# Altium PCB motor_driver.PcbDoc
Units mil, origin at the board's own origin, x right, y up, seen from the top; angles counter-clockwise.
Board outline 2190 x 2825 mil, 2 copper layers (Top Layer, Bottom Layer); 29 components, 33 nets, 118 pads, 30 vias.
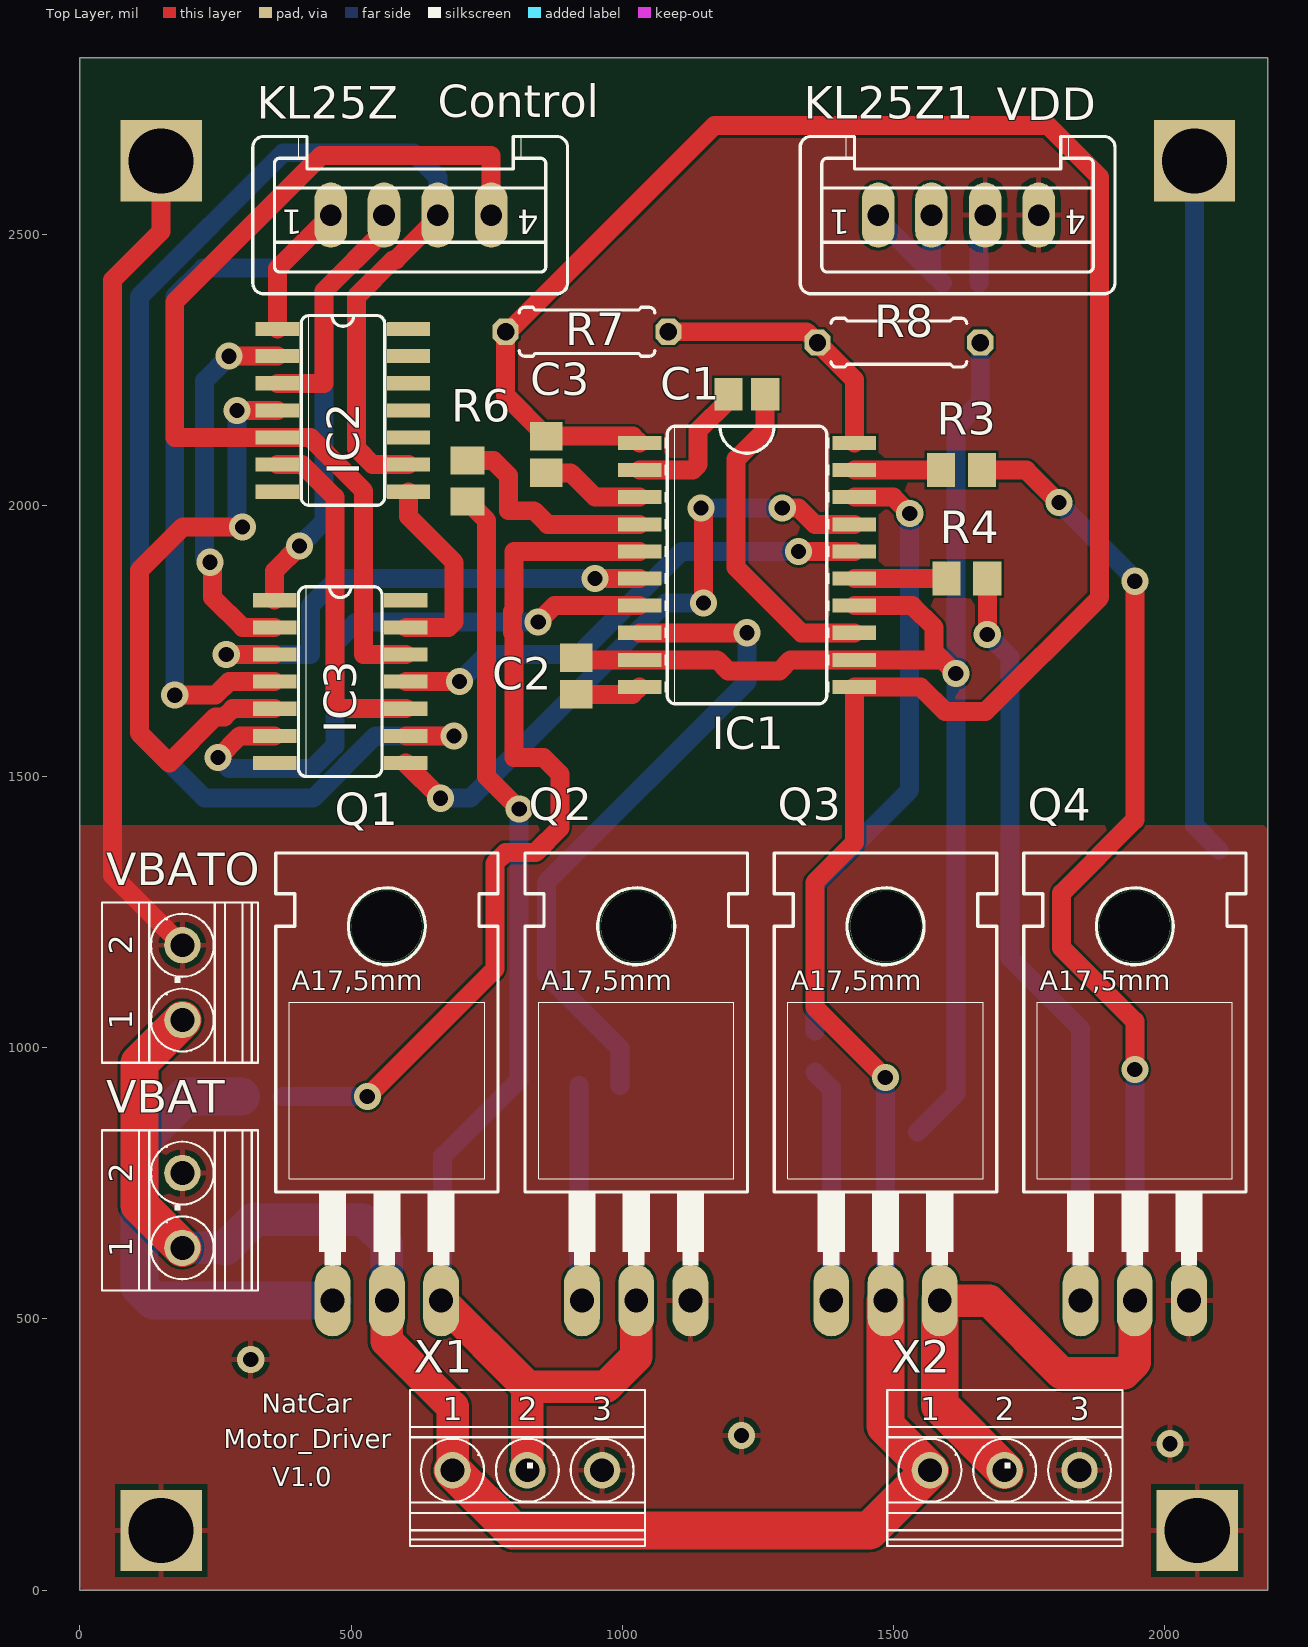
[diagram p0: Top Layer view]
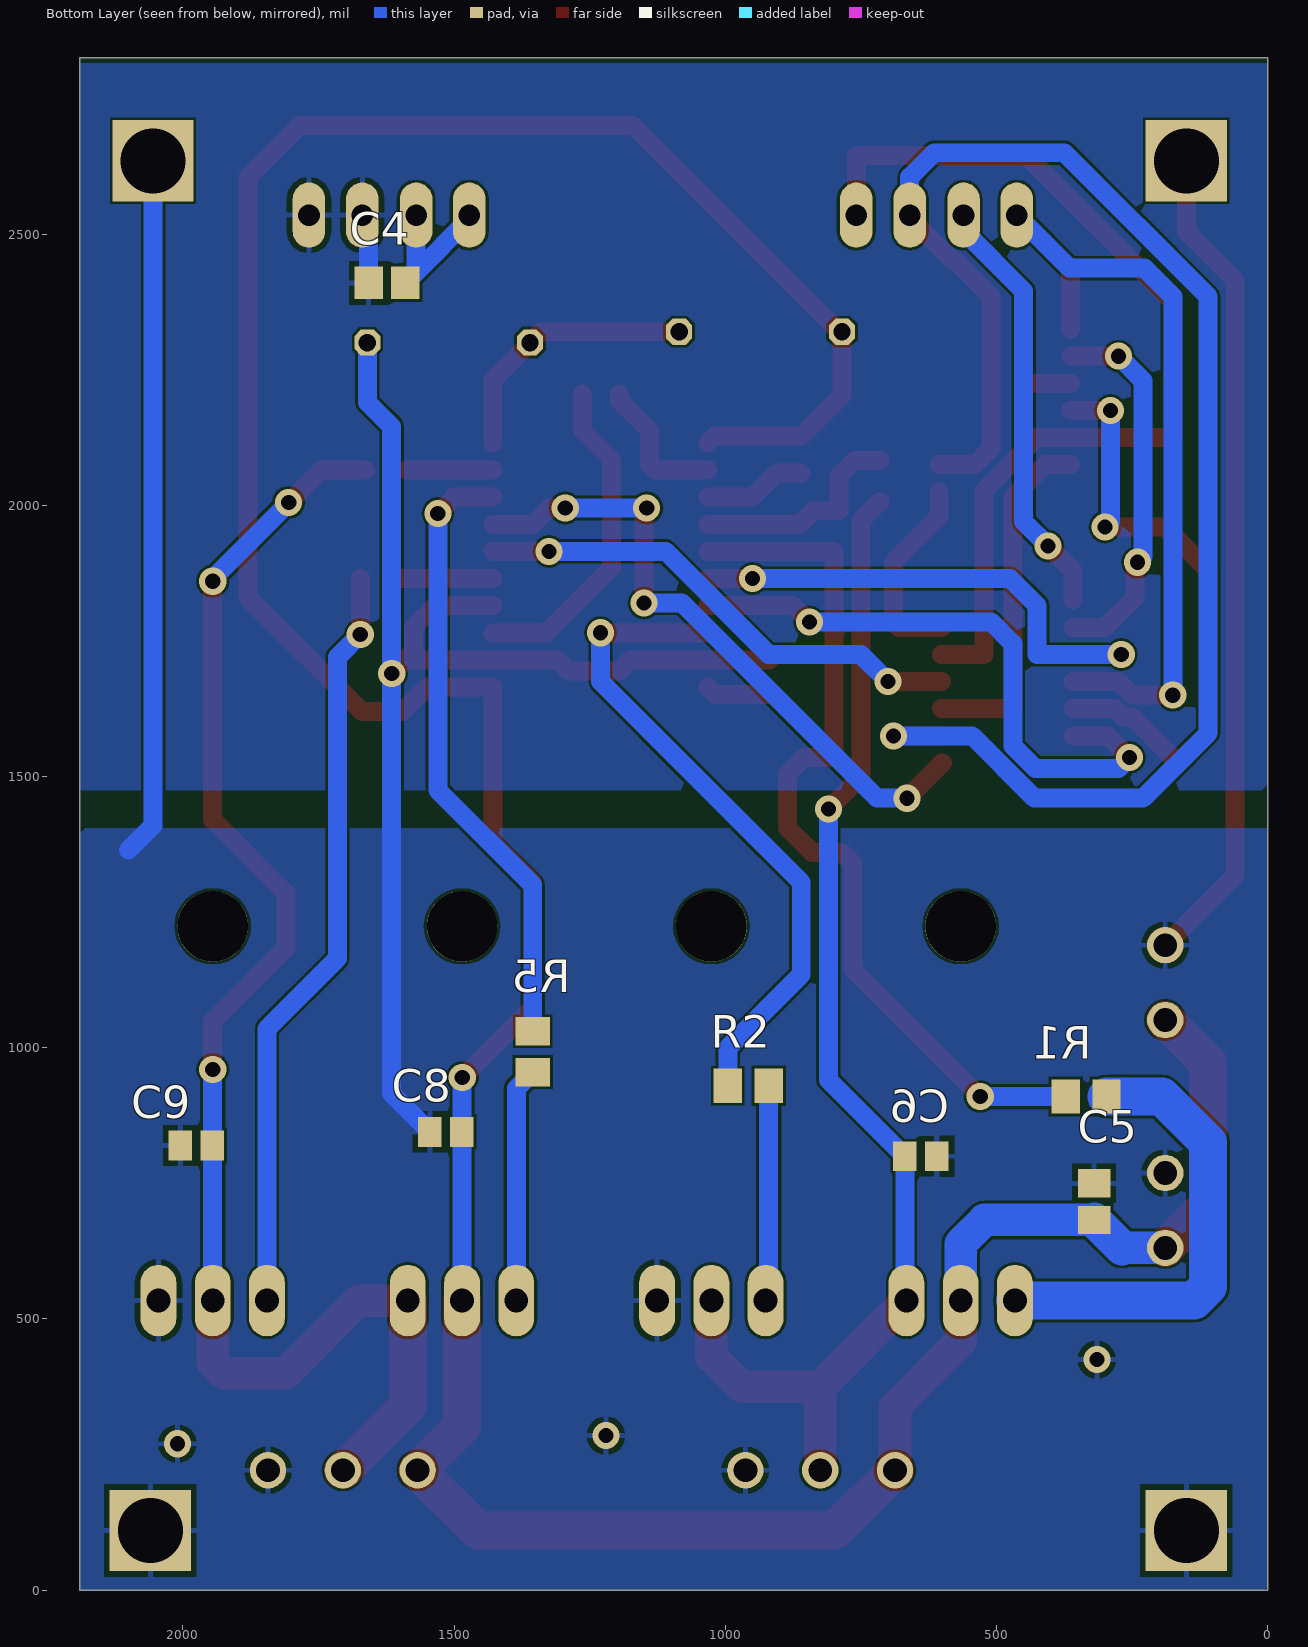
[diagram p1: Bottom Layer view, seen from below]

## Layer stack, top to bottom
Top Solder: solder mask 0.4, Solder Resist, Dk 3.5
Top Layer: signal copper 1.4
Dielectric 1: dielectric 12.6, FR-4, Dk 4.8
Bottom Layer: signal copper 1.4
Bottom Solder: solder mask 0.4, Solder Resist, Dk 3.5

## Board outline
0,0 2190,0 2190,2825 0,2825

## Design rules (kind name [scope] priority, off if disabled: settings)
Clearance [All] p1: gap=5
HoleSize [All] p1: absolutevalues=TRUE maxlimit=150 minlimit=15 maxpercent=80.000 minpercent=20.000
PolygonConnect [All] p1: connectstyle=Relief reliefconductorwidth=10 reliefentries=4 polygonreliefangle="90 Angle" airgapwidth=10
RoutingVias [All] p1: holewidth=28 width=50 viastyle="Through Hole" minholewidth=28 minwidth=50 maxholewidth=28 maxwidth=50
SolderMaskExpansion [All] p1: expansion=4
UnpouredPolygon [All] p1: allowunpoured=FALSE
Width pwr [InNetClass('Motor')] p1: maxlimit=100 minlimit=35 preferedwidth=75
Width signal [All] p2: maxlimit=35 minlimit=10 preferedwidth=27 checkconnectedcopper=TRUE
28 further rules are at their usual default settings.

## Classes and differential pairs
net class Motor: GND NetC6_1 NetC9_1 NetQ1_G NetQ2_G NetQ3_G NetQ4_G VSS
net class KL25Z: GNDD NetIC1_6 NetIC1_7 NetIC1_16 NetIC1_17 NetIC2_1 NetIC2_2 NetIC2_3 NetIC2_4 NetIC2_5 NetIC2_6 NetIC2_8 NetIC2_9 VCC
net class MC33883: GND IC1EN NetC1_1 NetC1_2 NetC2_1 NetC3_2 NetC6_1 NetIC1_4 NetIC1_5 NetIC1_6 NetIC1_7 NetIC1_8 NetIC1_15 NetIC1_16 NetIC1_17 NetIC1_18 NetIC1_19 NetQ1_G NetQ2_G VSS

## Components (designator, comment, footprint, x,y, rotation, side; value= is the part's Value field where it differs from the comment)
C1 "33 nF" C0805#1 1230,2205 r180 top
C2 "470 nF" C0805#1 915,1685 r90 top
C3 "470 nF" C0805#1 860,2094 r270 top
C4 "1uF" C0805#1 1623.46,2410 r0 bottom
C5 "Cap Pol3" C0805#1 320,716 r90 bottom
C6 "Cap Pol3" C0805#2 639.53,800 r180 bottom
C8 "Cap Pol3" C0805#2 1515,845 r0 bottom
C9 "Cap Pol3" C0805#2 1975,820 r0 bottom
IC1 "MC33883DW" SO20l 1230,1890 r270 top
IC2 "74*04" SO14 485,2175 r270 top
IC3 "74*08N" SO14 480,1675 r270 top
KL25Z "S04P" S04P 610.79,2535 r180 top
KL25Z1 "S04P" S04P 1620,2535 r180 top
Q1 "irf3704" TO220BH 566.06,783.9 r0 top
Q2 "irf3704" TO220BH 1025.71,783.9 r0 top
Q3 "irf3704" TO220BH 1485.35,783.9 r0 top
Q4 "irf3704" TO220BH 1945,783.9 r0 top
R1 "50" M0805 335,910 r180 bottom
R2 "50" M0805 958,930 r180 bottom
R3 "10" M0805 1625,2065 r0 top
R4 "50" M0805 1635,1865 r0 top
R5 "50" M0805 1355,993 r270 bottom
R6 "10" M0805 715,2045 r270 top
R7 "R-US_0207/7" 0207/7 935,2320 r180 top
R8 "R-US_0207/7" 0207/7 1510,2300 r180 top
VBAT "1751248" 1751248 185,700 r90 top
VBATO "1751248" 1751248 185,1120 r90 top
X1 "Motor0" 1751251 825,225 r0 top
X2 "Motor2" 1751251 1705,225 r0 top

## Footprints (in the part's own frame and the unit in brackets; to place one, negate y for a bottom-side part, rotate by r counter-clockwise, add the part's x,y. Pads: shape width x height; smd on the part's side, far side on the other; paste and mask are expansions set on the pad)
0207/7 [mil]
  oct 48x48 hole 32: 1(-150,0) 2(150,0)
  silkscreen extent -125,-45 125,45
1751248 [mil]
  round 67 hole 44: 1(-68.9,-3.94) 2(69,-3.94)
  silkscreen extent -148,-144 148,144
1751251 [mil]
  round 67 hole 44: 1(-137.8,-3.94) 2(0,-3.94) 3(138,-3.94)
  silkscreen extent -217,-144 217,144
C0805#1 [mil]
  rect 52x60 smd: 1(-33.46,0) 2(34,0)
C0805#2 [mil] "Chip Capacitor, Body 2.0x1.3mm, IPC High Density"
  rect 43.31x55.12 smd: 1(-29.53,0) 2(29.53,0)
  body extent -43,-29 43,29, height 55
M0805 [mil]
  rect 52x63 smd: 1(-37.4,0) 2(38,0)
S04P [mil]
  oval 60x120 hole 40: 1(148,0) 2(50,0) 3(-49.21,0) 4(-147.64,0)
  silkscreen extent -288,-145 292,145
SO14 [mil]
  rect 26x80 smd: 1(-150,-121) 2(-100,-121) 3(-50,-121) 4(0,-121) 5(50,-121) 6(100,-121) 7(150,-121) 8(150,121) 9(100,121) 10(50,121) 11(0,121) 12(-50,121) 13(-100,121) 14(-150,121)
  silkscreen extent -175,-77 175,77
SO20l [mil]
  rect 26x80 smd: 1(-225,-198) 2(-175,-198) 3(-125,-198) 4(-75,-198) 5(-25,-198) 6(25,-198) 7(75,-198) 8(125,-198) 9(175,-198) 10(225,-198) 11(225,198) 12(175,198) 13(125,198) 14(75,198) 15(25,198) 16(-25,198) 17(-75,198) 18(-125,198) 19(-175,198) 20(-225,198)
  silkscreen extent -256,-152 256,152
TO220BH [mil]
  round 130 hole 130: 1(0,440)
  oval 66x132 hole 44: D(0,-250) G(-100,-250) S(100,-250)
  silkscreen extent -205,-185 205,575

## Part data
C1 C2 C3: library part C-USC0805, "<B>CAPACITOR</B>, American symbol"
C4: library part "Cap Pol3", "Polarized Capacitor (Surface Mount)"
C5 C6 C8 C9: "Polarized Capacitor (Surface Mount)"
IC1: "<b>Full Bridge Pre-Driver</b> 55V<p> / Source: www.motorola.com/... MC33883.pdf"
IC2: library part 74*04D
IC3: library part 74*08D
KL25Z KL25Z1: "<b>AMP MT CONNECTOR</b>"
Q1 Q2 Q3 Q4: library part IRF3704-H
R1 R2 R3 R4 R5 R6: library part R-US_M0805, "<B>RESISTOR</B>, American symbol"
R7 R8: "<B>RESISTOR</B>, American symbol"
VBAT VBATO: "<b>MKDS 1/ 2-3,5</b> Printklemme<p> / Nennstrom: 10 A<br> / Bemessungsspannung: 160 V<br> / Raster: 3,5 mm<br> / Polzahl: 2<br> / Montageart: L?ten<br> / Anschlussart: Schraubanschluss<br> / Anschlussrichtung vom Leiter zur Platine: 0°<br> / Source: http://eshop.phoenixcontact.com .. 1751248.pdf"
X1 X2: library part 1751251

## Free pads (board coordinates)
  rect 150x150 hole 120: 3(150,110) 3(150,2635) 3(2055,2635) 3(2060,110)

## Via types
v1: diameter 50, hole 28, Top Layer to Bottom Layer, 30 vias

## Nets (pads, with @x,y where several pads share a name; then routed paths per layer and width w, separated by ;. In a path a pad name is that pad's centre, name@x,y a point inside that pad or via, vN(x,y) a via of type N, cw(c..) or ccw(c..) an arc to the next point about the centre after c; other vN are vias at no path point)
GND: C2.2 C5.2 C6.2 C8.2 C9.2 IC1.9 IC1.12 IC1.14 pad.3 Q2.S Q4.S R8.1 VBAT.2 VBATO.2 X1.3 X2.3 | length 5290.1
  Top Layer w35: pad.3@150,2635 150,2505 60,2415 60,1317.94 VBATO.2 ; C2.2 919,1715 IC1.9 1175,1715 1195,1695 1290,1695 1310,1715 IC1.12 1590,1715 ; IC1.14 1535,1815 1575,1775 1575,1730 1590,1715 ; v1(1615,1690) 1590,1715
  Bottom Layer w35: C8.2 1615,915.47 v1(1615,1690) 1615,2145 1660,2190 R8.1 R8.1@1657.46,2302.54 ; pad.3@2055,2635 2055,1410 2100,1365
  other v1: 2010,270 1220,285 315,425
GNDD: C4.2 KL25Z1.3 KL25Z1.4 | length 129.9
  Bottom Layer w35: C4.2 1657.46,2523.25 KL25Z1.3
IC1EN: IC1.20 R7.1 R8.2 | length 496.5
  Top Layer w35: R7.1 1340,2320 R8.2 1428,2232 IC1.20
NetC1_1: C1.1 IC1.13 | length 609.9
  Top Layer w35: C1.1 1263.46,2138.46 1210,2085 1210,1885 1330,1765 IC1.13
NetC1_2: C1.2 IC1.2 | length 265.3
  Top Layer w35: IC1.2 1130,2065 1140,2075 1140,2138.1 1196,2194.1 C1.2
NetC2_1: C2.1 IC1.10 | length 122.6
  Top Layer w35: C2.1 1018.54,1651.54 IC1.10
NetC3_2: C3.2 IC1.3 | length 190.6
  Top Layer w35: C3.2 905,2060 950,2015 IC1.3
NetC6_1: C6.1 Q1.S Q2.D R6.2 X1.2 | length 2277.7
  Top Layer w35: R6.2 750,1972 750,1500 v1(810,1440)
  Top Layer w60: Q1.S 825,374.96 ; X1.2 825,374.96 ; Q2.D 1025.71,430.71 969.96,374.96 825,374.96
  Bottom Layer w35: Q1.S 669.06,536.89 C6.1 810,940.94 v1(810,1440)
NetC9_1: C9.1 Q3.S Q4.D R3.2 X2.2 | length 2707.5
  Top Layer w35: R3.2 1745,2065 v1(1805,2005) ; v1(1945,960) 1945,1048.9 1810,1183.9 1810,1285 1945,1420 v1(1945,1860)
  Top Layer w60: Q3.S 1676.1,533.9 1810,400 1925,400 1945,420 Q4.D
  Top Layer w70: Q3.S 1585.35,340.71 X2.2
  Bottom Layer w35: v1(1805,2005) 1945,1865 v1(1945,1860) ; Q4.D v1(1945,960)
NetIC1_4: IC1.4 R6.1 | length 403.7
  Top Layer w35: R6.1 762.6,2082.4 790,2055 790,1990 837.4,1990 862.4,1965 IC1.4
NetIC1_5: IC1.5 R1.1 | length 1643.4
  Top Layer w35: v1(530,910) 765,1145 765,1340 785,1360 840,1360 885,1405 885,1505 855,1535 800,1535 800,1762.82 797.5,1765.32 797.5,1804.68 800,1807.18 800,1915 IC1.5
  Bottom Layer w35: R1.1 v1(530,910)
NetIC1_6: IC1.6 IC3.3 | length 961.7
  Top Layer w35: v1(270,1725) IC3.3 ; v1(950,1865) IC1.6
  Bottom Layer w35: v1(270,1725) 425,1725 425,1815 475,1865 v1(950,1865)
NetIC1_7: IC1.7 IC3.6 | length 1140.5
  Top Layer w35: v1(255,1535) 295,1575 IC3.6 ; v1(845,1785) 875,1815 IC1.7
  Bottom Layer w35: v1(255,1535) 275,1515 428.43,1515 470,1556.57 470,1745 510,1785 v1(845,1785)
NetIC1_8: IC1.8 R2.1 | length 1242.3
  Top Layer w35: IC1.8 v1(1230,1765)
  Bottom Layer w35: R2.1 995.4,999.6 860,1135 860,1305 1230,1675 v1(1230,1765)
NetIC1_15: IC1.15 R4.1 | length 169.6
  Top Layer w35: IC1.15 R4.1
NetIC1_16: IC1.16 IC3.11 | length 926.4
  Top Layer w35: IC3.11 v1(700,1675) ; v1(1325,1915) IC1.16
  Bottom Layer w35: v1(700,1675) 750,1725 920,1725 1110,1915 v1(1325,1915)
NetIC1_17: IC1.17 IC3.8 | length 1202.5
  Top Layer w35: IC3.8 600,1525 v1(665,1460) ; v1(1145,1995) 1150,1995 v1(1150,1820) ; v1(1295,1995) 1325,1995 1355,1965 IC1.17
  Bottom Layer w35: v1(665,1460) 720,1460 1080,1820 v1(1150,1820) ; v1(1145,1995) v1(1295,1995)
NetIC1_18: IC1.18 R5.1 | length 1141.5
  Top Layer w35: IC1.18 1500,2015 v1(1530,1985)
  Bottom Layer w35: R5.1 1355,1300 1530,1475 v1(1530,1985)
NetIC1_19: IC1.19 R3.1 | length 159.6
  Top Layer w35: IC1.19 R3.1
NetIC2_1: IC2.1 IC3.4 KL25Z.1 | length 1530.2
  Top Layer w35: v1(175,1650) 250,1650 275,1675 IC3.4 ; IC2.1 364,2436.21 KL25Z.1
  Bottom Layer w35: v1(175,1650) 175,2385 227.21,2437.21 365,2437.21 KL25Z.1
NetIC2_2: IC2.2 IC3.2 | length 695.6
  Top Layer w35: v1(240,1895) 245,1890 245,1830 300,1775 IC3.2 ; v1(275,2275) IC2.2
  Bottom Layer w35: v1(240,1895) 230,1905 230,2230 v1(275,2275)
NetIC2_3: IC2.3 IC3.1 KL25Z.2 | length 1235.5
  Top Layer w35: IC3.1 359,1879 v1(405,1925) ; IC2.3 450,2225 450,2395 560.79,2505.79 KL25Z.2
  Bottom Layer w35: v1(405,1925) 450,1970 450,2395 560.79,2505.79 KL25Z.2
NetIC2_4: IC2.4 IC3.5 | length 1129.5
  Top Layer w35: v1(290,2175) IC2.4 ; v1(300,1960) 190,1960 110,1880 110,1580 165,1525 250,1610 266.57,1610 281.57,1625 IC3.5
  Bottom Layer w35: v1(290,2175) 290,1970 v1(300,1960)
NetIC2_5: IC2.5 IC3.12 KL25Z.4 | length 1823.7
  Top Layer w35: IC3.12 523.25,1725 523.25,2026.75 425,2125 IC2.5 175,2125 175,2375 445,2645 758.43,2645 KL25Z.4
NetIC2_6: IC2.6 IC3.10 | length 651.9
  Top Layer w35: IC2.6 410,2075 470,2015 470,1625 IC3.10
NetIC2_8: IC2.8 IC3.13 | length 367.9
  Top Layer w35: IC3.13 680,1775 690,1785 690,1895 606,1979 IC2.8
NetIC2_9: IC2.9 IC3.9 KL25Z.3 | length 2923.3
  Top Layer w35: IC3.9 v1(690,1575) ; IC2.9 540,2075 510,2105 510,2385 577.5,2452.5 582.53,2452.5 660,2529.97 KL25Z.3
  Bottom Layer w35: KL25Z.3 660,2605 615,2650 375,2650 110,2385 110,1580 230,1460 430,1460 545,1575 v1(690,1575)
NetQ1_G: Q1.G R1.2 | length 854.1
  Bottom Layer w70: R1.2 195,910 110,825 110,560 136.1,533.9 Q1.G
NetQ2_G: Q2.G R2.2 | length 398.5
  Bottom Layer w35: R2.2 920,539.61 Q2.G
NetQ3_G: Q3.G R5.2 | length 433.7
  Bottom Layer w35: R5.2 1385.35,924.65 Q3.G
NetQ4_G: Q4.G R4.2 | length 1402.3
  Top Layer w35: v1(1673,1762) R4.2
  Bottom Layer w35: v1(1673,1762) 1715,1720 1715,1165 1845,1035 Q4.G
VCC: C4.1 KL25Z1.1 KL25Z1.2 | length 278.9
  Bottom Layer w35: KL25Z1.1 1472,2528 C4.1@1570,2430 ; KL25Z1.2 C4.1@1570,2430 ; C4.1 C4.1@1570,2430
VSS: C3.1 C5.1 C8.1 IC1.1 IC1.11 Q1.D Q3.D R7.2 VBAT.1 VBATO.1 X1.1 X2.1 | length 6929.3
  Top Layer w35: IC1.1 1019.54,2127.46 C3.1 785,2202.46 R7.2 790,2320 1170,2700 1785,2700 1880,2605 1880,1830 1670,1620 1595,1620 1550,1665 IC1.11 1428,1378 1355,1305 1355,1075 v1(1485,945)
  Top Layer w60: Q1.D 566.06,458.94 687.2,337.8 X1.1
  Top Layer w70: VBAT.1 110,710.04 110,972.16 VBATO.1 ; X1.1 798.27,110 1456.14,110 X2.1 1485.35,302.91 Q3.D
  Bottom Layer w35: v1(1485,945) 1485.47,944.53 C8.1 1485.47,534.02 Q3.D
  Bottom Layer w60: VBAT.1 268.57,631.1 ; C5.1 522.46,682.54 566.06,638.94 Q1.D
  Bottom Layer w65: 268.57,631.1 C5.1
pads on no net: IC2.7 IC2.10 IC2.11 IC2.12 IC2.13 IC2.14 IC3.7 IC3.14 Q1.1 Q2.1 Q3.1 Q4.1

## Polygon pours and split planes (outlines as drawn)
GND on Bottom Layer "Motor- GND" (solid, remove dead copper, pour order 10): 0,0 2190,0 2190,1395 2185,1400 2180,1405 0,1405
GNDD on Bottom Layer "Control- GNDD" (solid, remove dead copper, pour order 16): 0,2815 0,1475 2190,1475 2190,2815
GND on Top Layer "Motor- GND" (solid, remove dead copper, pour order 12): 0,0 2190,0 2190,1410 0,1410
GNDD on Top Layer "Control- GND" (solid, remove dead copper, pour order 14): 0,2815 0,1475 2190,1475 2190,2815 0,2815

## Silkscreen, mask and mechanical layers (free items; w line width, h text height)
Top Overlay:
  text "Control" at 660,2715 h60
  text "VDD" at 1690,2710 h60
  text "NatCar" at 335,315 h60
  text "Motor_Driver" at 265,250 h60
  text "V1.0" at 355,180 h60
Mechanical 1:
  the board outline again, w10

## Text inside footprints (layer, text, board x,y; h text height)
KL25Z: Top Overlay "1" at 410.79,2560 h77.5 r180; Top Overlay "4" at 846.15,2560 h77.5 r180
KL25Z1: Top Overlay "1" at 1420,2560 h77.5 r180; Top Overlay "4" at 1855.36,2560 h77.5 r180
Q1: Top Overlay "A17,5mm" at 391.06,1093.9 h62
Q2: Top Overlay "A17,5mm" at 850.71,1093.9 h62
Q3: Top Overlay "A17,5mm" at 1310.35,1093.9 h62
Q4: Top Overlay "A17,5mm" at 1770,1093.9 h62
VBAT: Top Overlay "1" at 97,613.39 h42.5 r90; Top Overlay "2" at 97,751 h42.5 r90
VBATO: Top Overlay "1" at 97,1033.39 h42.5 r90; Top Overlay "2" at 97,1171 h42.5 r90
X1: Top Overlay "1" at 669.49,313 h42.5; Top Overlay "2" at 806.99,313 h42.5; Top Overlay "3" at 945,313 h42.5
X2: Top Overlay "1" at 1549.49,313 h42.5; Top Overlay "2" at 1686.99,313 h42.5; Top Overlay "3" at 1825,313 h42.5